# Altium PCB ProtoStack_H750VBT.PcbDoc
Units mil, origin at the board's own origin, x right, y up, seen from the top; angles counter-clockwise.
Board outline 1259.84 x 4809.95 mil, 3 copper layers (Top Layer, Mid-Layer 2, Bottom Layer); 21 components, 96 nets, 324 pads, 70 vias.
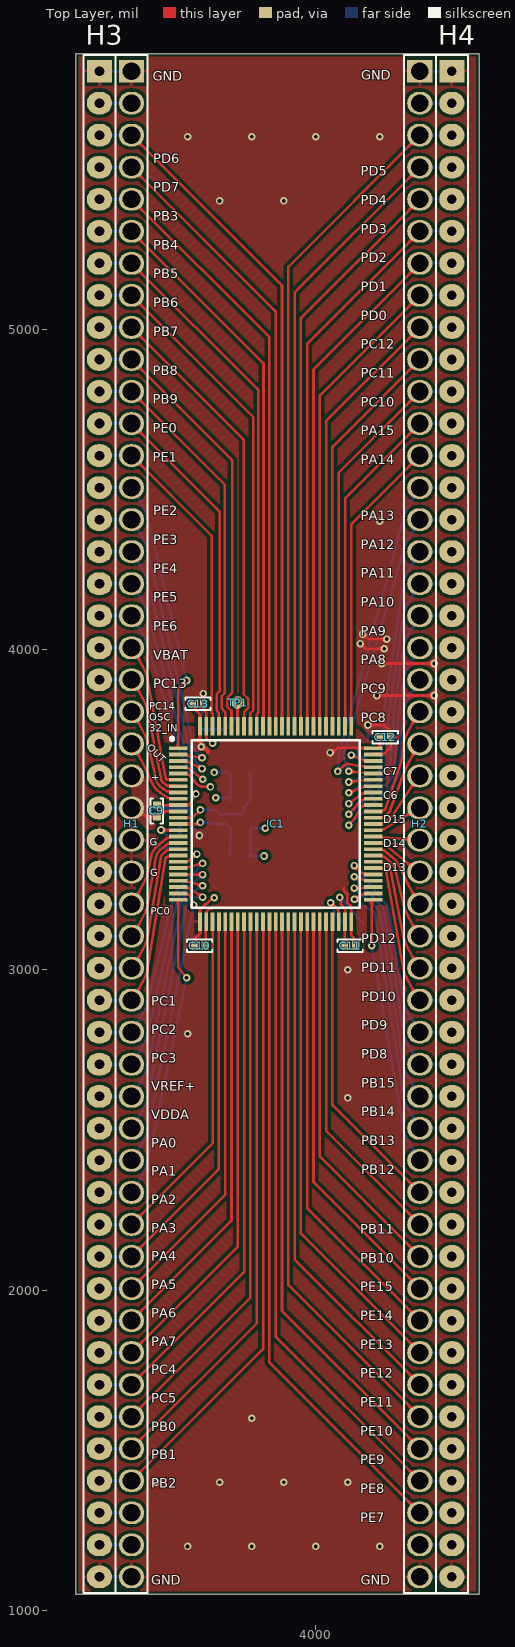
[diagram p0: Top Layer view]
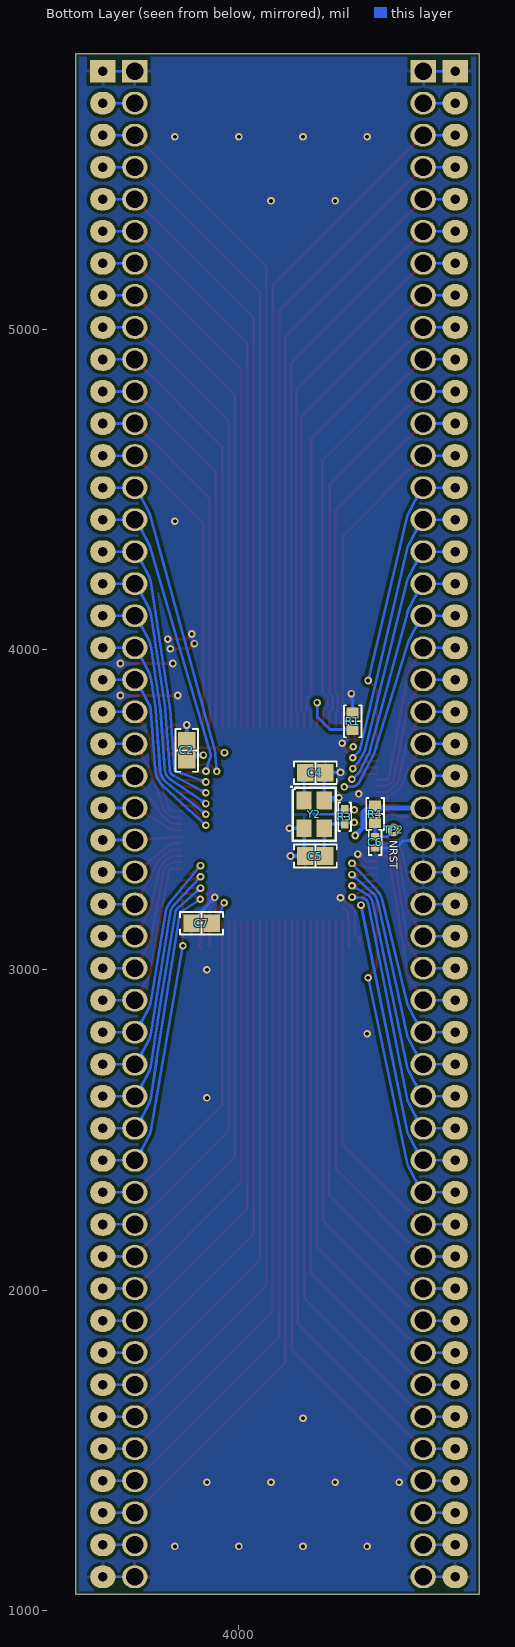
[diagram p1: Bottom Layer view, seen from below]

## Layer stack, top to bottom
Top Solder: solder mask 0.4, Solder Resist, Dk 3.5
Top Layer: signal copper 1.4
Dielectric 1: dielectric 12.6, FR-4, Dk 4.8
Mid-Layer 2: signal copper 1.4
Dielectric2: dielectric 12.6, FR-4, Dk 4.8
Bottom Layer: signal copper 1.4
Bottom Solder: solder mask 0.4, Solder Resist, Dk 3.5

## Board outline
3250.25,1050 3250.25,5859.95 4510.09,5859.95 4510.09,1050

## Design rules (kind name [scope] priority, off if disabled: settings)
BoardOutlineClearance [All] p1: gap=10 ignorepadtopadclearanceinfootprint=FALSE except(0: Arc-SplitContinuation Track-SplitContinuation SMDPad-SplitContinuation THPad-SplitContinuation Via-SplitContinuation Fill-SplitContinuation Poly-SplitContinuation Region-SplitContinuation Text-SplitContinuation)
Clearance [All] p1: gap=10 ignorepadtopadclearanceinfootprint=TRUE except(7: Arc-Arc Arc-Track Arc-SMDPad Arc-THPad Arc-Via Arc-Hole Track-Track Track-SMDPad Track-THPad Track-Via Track-Hole SMDPad-SMDPad SMDPad-THPad SMDPad-Via SMDPad-Hole THPad-Via Fill-Hole Poly-Hole Region-Hole Text-Text Text-Hole)
ComponentClearance [All] p1 off: gap=10 collisioncheckmode=3 verticalgap=10 showdistances=FALSE
PolygonConnect PolygonConnect_1 [All vs InNet('GND')] p1: thpad.connectstyle=Relief thpad.reliefconductorwidth=10 thpad.reliefentries=4 thpad.polygonreliefangle="90 Angle" thpad.airgapwidth=10 smdpad.connectstyle=Relief smdpad.reliefconductorwidth=10 smdpad.reliefentries=4 smdpad.polygonreliefangle="90 Angle" smdpad.airgapwidth=10 via.connectstyle=Direct via.reliefconductorwidth=10 via.reliefentries=4 via.polygonreliefangle="90 Angle" via.airgapwidth=10
PolygonConnect [All vs InNet('+MCU')] p2: thpad.connectstyle=Direct thpad.reliefconductorwidth=10 thpad.reliefentries=4 thpad.polygonreliefangle="90 Angle" thpad.airgapwidth=10 smdpad.connectstyle=Relief smdpad.reliefconductorwidth=10 smdpad.reliefentries=4 smdpad.polygonreliefangle="90 Angle" smdpad.airgapwidth=10 via.connectstyle=Direct via.reliefconductorwidth=10 via.reliefentries=4 via.polygonreliefangle="90 Angle" via.airgapwidth=10
RoutingVias [All] p1: holewidth=11.81 width=23.62 viastyle="Through Hole" minholewidth=11.81 minwidth=23.62 maxholewidth=11.81 maxwidth=23.62
SilkToSilkClearance [All] p1 off: silktosilkclearance=10
SilkToSolderMaskClearance [IsPad] p1 off: minsilkscreentomaskgap=10 clearancetoexposedcopper=TRUE
SolderMaskExpansion [All] p1: expansion=4 istentingtop=FALSE
Width [All] p1: maxlimit=20 minlimit=8 preferedwidth=8
27 further rules are at their usual default settings.

## Components (designator, comment, footprint, x,y, rotation, side; value= is the part's Value field where it differs from the comment)
C2 "2.2µF" "CAP 0805_2012" 4163,3685 r90 bottom
C4 "9pF" "CAP 0805_2012" 3761.5,3615 r0 bottom
C5 "9pF" "CAP 0805_2012" 3761.5,3355 r180 bottom
C6 "0.1µF" "CAP 0402_1005" 3575,3397.68 r90 bottom
C7 "2.2µF" "CAP 0805_2012" 4116.5,3145 r180 bottom
C9 "0.1µF" "CAP 0402_1005" 3504,3495.68 r90 top
C10 "0.1µF" "CAP 0402_1005" 3637.68,3075 r180 top
C11 "0.1µF" "CAP 0402_1005" 4107.32,3075 r180 top
C12 "0.1µF" "CAP 0402_1005" 4217,3726 r0 top
C13 "0.1µF" "CAP 0402_1005" 3632.68,3830 r0 top
H1 "RoundedHeader" HeaderDtack_48 3425,5805 r270 top
H2 "RoundedHeader" HeaderDtack_48 4325,5805 r270 top
H3 "male pin header" Header_48 3325,5805 r270 top
H4 "male pin header" Header_48 4425,5805 r270 top
IC1 "STM32H750VBT6" QFP50P1600X1600X160-100N 3875,3455 r0 top
R1 "10 kOhms" "RES 0603_1608" 3645,3775.59 r90 bottom
R3 "100 Ohms" "RES 0402_1005" 3670,3477.64 r90 bottom
R4 "10 kOhms" "RES 0603_1608" 3575,3485.59 r270 bottom
TP1 "TestPoint" TESTPOINT_VIA 3755.95,3834.06 r90 top
TP2 "NRST" TESTPOINT 3517.17,3436.35 r90 bottom
Y2 "24MHz" "NDK NX3225SA" 3765,3485 r270 bottom

## Footprints (in the part's own frame and the unit in brackets; to place one, negate y for a bottom-side part, rotate by r counter-clockwise, add the part's x,y. Pads: shape width x height; smd on the part's side, far side on the other; paste and mask are expansions set on the pad)
"CAP 0402_1005" [mm] "Chip Capacitor, 2-Leads, Body 1.02x0.51mm, IPC Medium Density"
  rect 0.6x0.64 smd: 1(-0.44,0) 2(0.44,0)
  silkscreen extent -1,-0.5 1,0.5, body extent -0.5,-0.26 0.5,0.26, height 0.52
"CAP 0805_2012" [mm] "Chip Capacitor, 2-Leads, Body 2.00x1.20mm, IPC Medium Density"
  rect 1.3x1.4 smd: 1(-0.8,0) 2(0.8,0)
  silkscreen extent -1.7,-0.9 1.7,0.9, body extent -1,-0.64 1,0.64, height 1.26
Header_48 [mm]
  rect 1.8x2 hole 0.762: 1(0,0)
  oval 1.8x2 hole 0.762: 2(2.54,0) 3(5.08,0) 4(7.62,0) 5(10.16,0) 6(12.7,0) 7(15.24,0) 8(17.78,0) 9(20.32,0) 10(22.86,0) 11(25.4,0) 12(27.94,0) 13(30.48,0) 14(33.02,0) 15(35.56,0) 16(38.1,0) 17(40.64,0) 18(43.18,0) 19(45.72,0) 20(48.26,0) 21(50.8,0) 22(53.34,0) 23(55.88,0) 24(58.42,0) 25(60.96,0) 26(63.5,0) 27(66.04,0) 28(68.58,0) 29(71.12,0) 30(73.66,0) 31(76.2,0) 32(78.74,0) 33(81.28,0) 34(83.82,0) 35(86.36,0) 36(88.9,0) 37(91.44,0) 38(93.98,0) 39(96.52,0) 40(99.06,0) 41(101.6,0) 42(104.14,0) 43(106.68,0) 44(109.22,0) 45(111.76,0) 46(114.3,0) 47(116.84,0) 48(119.38,0)
  silkscreen extent -1.27,-1.27 120.65,1.27
HeaderDtack_48 [mm]
  rect 1.8x2 hole 1.4: 1(0,0)
  oval 1.8x2 hole 1.4: 2(2.54,0) 3(5.08,0) 4(7.62,0) 5(10.16,0) 6(12.7,0) 7(15.24,0) 8(17.78,0) 9(20.32,0) 10(22.86,0) 11(25.4,0) 12(27.94,0) 13(30.48,0) 14(33.02,0) 15(35.56,0) 16(38.1,0) 17(40.64,0) 18(43.18,0) 19(45.72,0) 20(48.26,0) 21(50.8,0) 22(53.34,0) 23(55.88,0) 24(58.42,0) 25(60.96,0) 26(63.5,0) 27(66.04,0) 28(68.58,0) 29(71.12,0) 30(73.66,0) 31(76.2,0) 32(78.74,0) 33(81.28,0) 34(83.82,0) 35(86.36,0) 36(88.9,0) 37(91.44,0) 38(93.98,0) 39(96.52,0) 40(99.06,0) 41(101.6,0) 42(104.14,0) 43(106.68,0) 44(109.22,0) 45(111.76,0) 46(114.3,0) 47(116.84,0) 48(119.38,0)
  silkscreen extent -1.27,-1.27 120.65,1.27
"NDK NX3225SA" [mm] "Crystal, 4-Leads, Body 2.50x3.20mm, Pitch 2.20mm, IPC Medium Density"
  rect 1.4x1.2 smd: 1(-1.1,-0.8) 2(1.1,-0.8) 3(1.1,0.8) 4(-1.1,0.8)
  silkscreen extent -2.25,-1.85 2.1,1.7, body extent -1.61,-1.26 1.61,1.26, height 0.6
QFP50P1600X1600X160-100N [mm]
  rect 1.475x0.3 smd: 1(-7.738,6) 2(-7.738,5.5) 3(-7.738,5) 4(-7.738,4.5) 5(-7.738,4) 6(-7.738,3.5) 7(-7.738,3) 8(-7.738,2.5) 9(-7.738,2) 10(-7.738,1.5) 11(-7.738,1) 12(-7.738,0.5) 13(-7.738,0) 14(-7.738,-0.5) 15(-7.738,-1) 16(-7.738,-1.5) 17(-7.738,-2) 18(-7.738,-2.5) 19(-7.738,-3) 20(-7.738,-3.5) 21(-7.738,-4) 22(-7.738,-4.5) 23(-7.738,-5) 24(-7.738,-5.5) 25(-7.738,-6) 51(7.738,-6) 52(7.738,-5.5) 53(7.738,-5) 54(7.738,-4.5) 55(7.738,-4) 56(7.738,-3.5) 57(7.738,-3) 58(7.738,-2.5) 59(7.738,-2) 60(7.738,-1.5) 61(7.738,-1) 62(7.738,-0.5) 63(7.738,0) 64(7.738,0.5) 65(7.738,1) 66(7.738,1.5) 67(7.738,2) 68(7.738,2.5) 69(7.738,3) 70(7.738,3.5) 71(7.738,4) 72(7.738,4.5) 73(7.738,5) 74(7.738,5.5) 75(7.738,6)
  rect 0.3x1.475 smd: 26(-6,-7.738) 27(-5.5,-7.738) 28(-5,-7.738) 29(-4.5,-7.738) 30(-4,-7.738) 31(-3.5,-7.738) 32(-3,-7.738) 33(-2.5,-7.738) 34(-2,-7.738) 35(-1.5,-7.738) 36(-1,-7.738) 37(-0.5,-7.738) 38(0,-7.738) 39(0.5,-7.738) 40(1,-7.738) 41(1.5,-7.738) 42(2,-7.738) 43(2.5,-7.738) 44(3,-7.738) 45(3.5,-7.738) 46(4,-7.738) 47(4.5,-7.738) 48(5,-7.738) 49(5.5,-7.738) 50(6,-7.738) 76(6,7.738) 77(5.5,7.738) 78(5,7.738) 79(4.5,7.738) 80(4,7.738) 81(3.5,7.738) 82(3,7.738) 83(2.5,7.738) 84(2,7.738) 85(1.5,7.738) 86(1,7.738) 87(0.5,7.738) 88(0,7.738) 89(-0.5,7.738) 90(-1,7.738) 91(-1.5,7.738) 92(-2,7.738) 93(-2.5,7.738) 94(-3,7.738) 95(-3.5,7.738) 96(-4,7.738) 97(-4.5,7.738) 98(-5,7.738) 99(-5.5,7.738) 100(-6,7.738)
  silkscreen extent -8.35,-6.65 6.65,6.87, body extent -8,-8 8,8, height 1.6
"RES 0402_1005" [mm] "Chip Resistor, 2-Leads, Body 1.0x0.5mm, IPC Medium Density"
  rect 0.75x0.6 smd: 1(-0.575,0) 2(0.575,0)
  silkscreen extent -1.14,-0.51 1.14,0.51, body extent -0.5,-0.25 0.5,0.25, height 0.35
"RES 0603_1608" [mm] "Chip Resistor, 2-Leads, Body 1.60x0.80mm, IPC Medium Density"
  rect 0.85x0.95 smd: 1(-0.65,0) 2(0.65,0)
  silkscreen extent -1.27,-0.7 1.27,0.7, body extent -0.8,-0.4 0.8,0.4, height 0.45
TESTPOINT [mil]
  round 39.37 / inner round 0 / far side round 0 all layers, no hole mask+1.98: 1(0,0)
TESTPOINT_VIA [mm]
  round 1 / inner round 0 / far side round 0 all layers, no hole mask+0.102: 1(0,0)

## Part data
C2 C7: library part C0805C225K8RACTU, "CAP CER 2.2UF 10V X7R 0805", Device Package="0805 (2012 Metric)", Manufacturer=KEMET, Operating Temperature="-55°C ~ 125°C", Supplier Part Number 1=399-3522-1-ND, Temperature Coefficient=X7R, Tolerance=±10%, Voltage - Rated=10V, Applications="Bypass, Decoupling", Capacitance=2.2µF, ComponentLink1Description=Datasheet, ComponentLink1URL=https://api.kemet.com/component-edge/download/datasheet/C0805C225K8RACTU.pdf, ComponentLink2Description="DigiKey Link", ComponentLink2URL=http://digikey.com/product-detail/en/kemet/C0805C225K8RACTU/399-3522-1-ND/789662, LastUpdated="9/2/2020 1:04:33 AM", Lifecycle Status=Active, Minimum Order=1, Mounting Type="Surface Mount, MLCC", Package / Case="0805 (2012 Metric)", Packaging=TapeAndReel, Part Number=C0805C225K8RACTU, Part Status=Active, PartId=7297, Price=0.04, Series="SMD Comm X7R", Size / Dimension="0.079\" L x 0.049\" W (2.00mm x 1.25mm)", Supplier 1=DigiKey, Thickness (Max)="0.055\" (1.40mm)"
C4 C5: library part CBR08C909CAGAC, "CAP CER 9PF 250V C0G/NP0 0805", Device Package="0805 (2012 Metric)", Manufacturer=KEMET, Operating Temperature="-55°C ~ 125°C", Supplier Part Number 1=399-8711-1-ND, Temperature Coefficient="C0G, NP0", Tolerance=±0.25pF, Voltage - Rated=250V, Applications="RF, Microwave, High Frequency", Capacitance=9pF, ComponentLink1Description=Datasheet, ComponentLink1URL=https://api.kemet.com/component-edge/download/datasheet/CBR08C909CAGAC.pdf, ComponentLink2Description="DigiKey Link", ComponentLink2URL=http://digikey.com/product-detail/en/kemet/CBR08C909CAGAC/399-8711-1-ND/3480335, Features="High Q, Low Loss, Ultra Low ESR", LastUpdated="9/2/2020 1:04:31 AM", Lifecycle Status=Active, Minimum Order=1, Mounting Type="Surface Mount, MLCC", Package / Case="0805 (2012 Metric)", Packaging=TapeAndReel, Part Number=CBR08C909CAGAC, Part Status=Active, PartId=8592, Price=0.28, Series="CBR-SMD RF C0G", Size / Dimension="0.079\" L x 0.049\" W (2.00mm x 1.25mm)", Supplier 1=DigiKey, Thickness (Max)="0.035\" (0.88mm)"
C6 C9 C10 C11 C12 C13: library part C0402C104K4RACAUTO, "CAP CER 0.1UF 16V X7R 0402", Device Package="0402 (1005 Metric)", Manufacturer=KEMET, Operating Temperature="-55°C ~ 125°C", Ratings=AEC-Q200, Supplier Part Number 1=399-6828-1-ND, Temperature Coefficient=X7R, Tolerance=±10%, Voltage - Rated=16V, Applications="Automotive, Bypass, Decoupling", Capacitance=0.1µF, ComponentLink1Description=Datasheet, ComponentLink1URL=https://api.kemet.com/component-edge/download/specsheet/C0402C104K4RACAUTO.pdf, ComponentLink2Description="DigiKey Link", ComponentLink2URL=http://digikey.com/product-detail/en/kemet/C0402C104K4RACAUTO/399-6828-1-ND/3314343, LastUpdated="9/2/2020 1:02:21 AM", Lifecycle Status=Active, Minimum Order=1, Mounting Type="Surface Mount, MLCC", Package / Case="0402 (1005 Metric)", Packaging=TapeAndReel, Part Number=C0402C104K4RACAUTO, Part Status=Active, PartId=3024, Price=0.01, Series="SMD Auto X7R", Size / Dimension="0.039\" L x 0.020\" W (1.00mm x 0.50mm)", Supplier 1=DigiKey, Thickness (Max)="0.022\" (0.55mm)"
H1: library part HeaderStack_48_H7VB50_L
H2: library part HeaderStack_48_H7VB50_R
H3 H4: library part Header_48
IC1: "Integrated Circuit", Manufacturer_Name=STMicroelectronics, Mouser Part Number=511-STM32H750VBT6, Arrow Part Number=STM32H750VBT6, Arrow Price/Stock=https://www.arrow.com/en/products/stm32h750vbt6/stmicroelectronics?region=nac, Datasheet Link=https://www.st.com/resource/en/datasheet/stm32h750vb.pdf, Height=1.6mm, Manufacturer_Part_Number=STM32H750VBT6, Mouser Price/Stock=https://www.mouser.co.uk/ProductDetail/STMicroelectronics/STM32H750VBT6?qs=%252BEew9%252B0nqrBAeuu%2FsQQSzQ%3D%3D
R1 R4: library part RT0603FRE0710KL, "RES SMD 10K OHM 1% 1/10W 0603", Device Package="0603 (1608 Metric)", Manufacturer=Yageo, Operating Temperature="-55°C ~ 155°C", Power (Watts)="0.1W, 1/10W", Supplier Device Package=0603, Supplier Part Number 1=YAG2321CT-ND, Temperature Coefficient=±50ppm/°C, Tolerance=±1%, ComponentLink1Description=Datasheet, ComponentLink1URL=https://www.yageo.com/upload/media/product/productsearch/datasheet/rchip/PYu-RT_1-to-0.01_RoHS_L_11.pdf, ComponentLink2Description="DigiKey Link", ComponentLink2URL=http://digikey.com/product-detail/en/yageo/RT0603FRE0710KL/YAG2321CT-ND/5252435, Composition="Thin Film", Height - Seated (Max)="0.022\" (0.55mm)", LastUpdated="9/2/2020 1:10:23 AM", Lifecycle Status=Active, Minimum Order=1, Number of Terminations=2, Package / Case="0603 (1608 Metric)", Packaging=TapeAndReel, Part Number=RT0603FRE0710KL, Part Status=Active, PartId=5671, Price=0.01, Resistance="10 kOhms", Series=RT, Size / Dimension="0.063\" L x 0.031\" W (1.60mm x 0.80mm)", Supplier 1=DigiKey
R3: library part RT0402FRE07100RL, "RES SMD 100 OHM 1% 1/16W 0402", Device Package="0402 (1005 Metric)", Manufacturer=Yageo, Operating Temperature="-55°C ~ 155°C", Power (Watts)="0.063W, 1/16W", Supplier Device Package=0402, Supplier Part Number 1=YAG3342CT-ND, Temperature Coefficient=±50ppm/°C, Tolerance=±1%, ComponentLink1Description=Datasheet, ComponentLink1URL=https://www.yageo.com/upload/media/product/productsearch/datasheet/rchip/PYu-RT_1-to-0.01_RoHS_L_11.pdf, ComponentLink2Description="DigiKey Link", ComponentLink2URL=http://digikey.com/product-detail/en/yageo/RT0402FRE07100RL/YAG3342CT-ND/5418047, Composition="Thin Film", Height - Seated (Max)="0.014\" (0.35mm)", LastUpdated="9/2/2020 1:08:09 AM", Lifecycle Status=Active, Minimum Order=1, Not Fit=NF, Number of Terminations=2, Package / Case="0402 (1005 Metric)", Packaging=TapeAndReel, Part Number=RT0402FRE07100RL, Part Status=Active, PartId=3193, Price=0.01, Resistance="100 Ohms", Series=RT, Size / Dimension="0.039\" L x 0.020\" W (1.00mm x 0.50mm)", Supplier 1=DigiKey
TP2: library part TestPoint
Y2: library part NX3225SA-24MHZ-EXS00A-CS07532, "CRYSTAL 24MHZ 9PF SMD", ESR (Equivalent Series Resistance)="100 Ohms", Load Capacitance=9pF, Manufacturer="NDK America, Inc.", Operating Mode=Fundamental, Operating Temperature="-40°C ~ 150°C", Package / Case="4-SMD, No Lead", Ratings=AEC-Q200, Supplier Part Number 1=644-1393-1-ND, ComponentLink2Description="DigiKey Link", ComponentLink2URL=http://digikey.com/product-detail/en/ndk-america-inc/NX3225SA-24MHZ-EXS00A-CS07532/644-1393-1-ND/9172121, Frequency=24MHz, Height - Seated (Max)="0.024\" (0.60mm)", LastUpdated="9/2/2020 1:21:59 AM", Lifecycle Status=Active, Minimum Order=1, Mounting Type="Surface Mount", Packaging=TapeAndReel, Part Number=NX3225SA-24MHZ-EXS00A-CS07532, Part Status=Active, PartId=571, Price=0.38, Series=NX3225SA, Size / Dimension="0.126\" L x 0.098\" W (3.20mm x 2.50mm)", Supplier 1=DigiKey, Type="MHz Crystal"

## Via types
v1: diameter 23.62, hole 11.81, Top Layer to Bottom Layer, tented both sides, 69 vias
v2: diameter 23.62/23.62/23.62 (per signal layer), hole 12, Top Layer to Bottom Layer, tented both sides, 1 vias

## Nets (pads, with @x,y where several pads share a name; then routed paths per layer and width w, separated by ;. In a path a pad name is that pad's centre, name@x,y a point inside that pad or via, vN(x,y) a via of type N, cw(c..) or ccw(c..) an arc to the next point about the centre after c; other vN are vias at no path point)
+MCU: C9.1 C10.1 C11.1 C12.1 C13.1 H1.23 H1.24 H3.23 H3.24 IC1.11 IC1.27 IC1.50 IC1.75 IC1.100 R4.1 | length 1432.8
  Top Layer w8: H1.24 3442.73,3505 3469.37,3478.35 C9.1 3511.81,3486.16 3523.16,3486.16 3531.37,3494.37 IC1.11 ; C13.1 3623.16,3822.19 3623.16,3811.84 3638.78,3796.22 IC1.100 3638.78,3710.22 ; 3627.76,3718 3631,3718 3638.78,3710.22 ; v1@3642.36,3706.64 3638.78,3710.22 ; v1@3642.38,3706.62 cw(c3636.71,3700.98) 3643.36,3696.54 v1(3643,3696) ; C10.1@3653.5,3073.5 C10.1 3656.73,3076.73 3656.73,3148.62 IC1.27 3660.37,3152.26 3660.37,3183.07 3667.69,3190.39 3674.37,3190.39 ; 3663.78,3675.48 3661.49,3677.77 3661.49,3679.18 v1@3647.66,3693.01 ; 3665.85,3686.89 3659.73,3693.01 v1@3650.22,3693.01 ; 3666.9,3682.68 3660.55,3682.68 v1@3650.22,3693.01 ; v1(4045,3678) 4046.19,3676.81 4052.81,3676.81 4068.81,3692.81 4178.06,3692.81 IC1.75 IC1.75@4192.16,3692.17 ; 4087,3254 4087,3246.55 4098.16,3235.4 4098.16,3210.55 4111.22,3197.49 IC1.50 4111.22,3107.27 4118.89,3099.6 4118.89,3080.76 C11.1 C11.1@4116.84,3066.4 ; C12.1 4199.68,3693.13 IC1.75@4199.26,3692.71 ; IC1.75@4204.68,3693.13 IC1.75@4199.26,3692.71 ; v1(3643,3696) 3645.99,3693.01 v1@3647.66,3693.01 ; v1(3643,3696) v1@3644.67,3696 ; v1@3644.67,3696 3647.23,3696 v1@3650.22,3693.01 ; v1@3644.67,3696 v1@3647.66,3693.01 ; v1@3647.66,3693.01 v1@3650.22,3693.01 ; IC1.75@4192.16,3692.17 4198.72,3692.17 IC1.75@4199.26,3692.71 ; IC1.75@4192.16,3692.17 IC1.75@4199.26,3692.71
  Bottom Layer w8: H3.24 H1.24 ; H3.23 H1.23
  Bottom Layer w15: H1.24 3568.82,3505 R4.1 3585.73,3500.45 3603.55,3500.45 3613,3491 3613,3443 v1(3637,3419)
GND: C2.2 C4.1 C5.1 C6.1 C7.1 C9.2 C10.2 C11.2 C12.2 C13.2 H1.1 H1.25 H1.26 H1.48 H2.1 H2.48 H3.1 H3.25 H3.26 H3.48 H4.1 H4.48 IC1.10 IC1.19 IC1.26 IC1.49 IC1.74 IC1.99 R1.2 Y2.2 Y2.4 | length 2760.8
  Top Layer w8: C9.2 3504.53,3513.53 3569.83,3513.53 IC1.10 3601.76,3514.06 ccw(c3601.76,3522.06) 3608.75,3518.15 v1(3626,3549) ; IC1.19 3572.26,3338.8 3603.36,3338.8 3625.56,3361 v1(3629,3361) ; C10.2 3622,3076.65 3622,3096 3638.78,3112.78 IC1.26 3638.78,3188.78 3654.19,3204.19 3658.19,3204.19 3679,3225 v1(3683,3225) ; v1(3649,3862) 3649.5,3861.5 3649.5,3830.5 C13.2 3650,3810 3658.46,3801.54 IC1.99 3658.46,3722.54 3674,3707 v1(3678,3707) ; v1(4075.34,3225.95) 4078.33,3222.96 4078.33,3204.59 4091.53,3191.39 IC1.49 4090.77,3149.59 4090.77,3075.77 C11.2 ; v1(4139,4018) 4155,4002 v1(4214,4002) ; v1(4147,4048) 4149,4048 4165,4032 v1(4222,4032) ; v1(4163,3764) 4212,3764 4226.51,3749.49 4226.51,3733.81 C12.2 4234.32,3695.4 4212.36,3673.44 4181.55,3673.44 IC1.74 ; v1(4191,3856) v1(4370,3856) ; v1(4206,3956) v1(4370,3956)
  Bottom Layer w8: H3.48 H1.48 ; H3.26 H1.26 ; H3.25 H1.25 3427,3403 3486,3403 3508.65,3380.35 C6.1 ; H3.1 H1.1 ; R1.2 3645,3858 v1(3649,3862) ; v1(3683,3616) 3729,3616 C4.1 3733.5,3611.5 Y2.4 ; v1(3688,3537) Y2.4@3734,3537 ; v1(3838.99,3355) C5.1 3796.5,3358.5 Y2.2 v1(3842.5,3441.69) ; v1(4075.34,3225.95) 4117.84,3180.86 ccw(c4123.67,3186.34) 4118.13,3180.57 cw(c4110.59,3172.56) 4119.78,3178.61 4126.4,3168.56 C7.1 ; C2.2 4163,3738.09 v1(4163,3764) ; v1@4221,4034 4221,4033 v1(4222,4032) ; H2.48 H4.48 ; H2.1 H4.1 ; v1(4370,3856) v1@4371,3856
  other v1: 3600,1200 3800,1200 4000,1200 4200,1200 3500,1400 3700,1400 3900,1400 4100,1400 3800,1600 4100,2600 3600,2800 4100,3000 4200,4400 3700,5400 3900,5400 3600,5600 3800,5600 4000,5600 4200,5600
NetC2_1: C2.1 IC1.73 | length 129
  Top Layer w8: v1(4111,3670) 4146.46,3655.44 ccw(c4150.61,3665.63) 4148.68,3654.8 4154.61,3653.76 IC1.73
  Bottom Layer w8: v1(4111,3670) 4139.44,3670 C2.1
NetC4_2: C4.2 IC1.12 R3.2 Y2.1 | length 356.7
  Top Layer w8: IC1.12 3615.69,3474.69 v1(3640,3499)
  Bottom Layer w8: v1(3640,3499) 3668.72,3499 R3.2 3671.28,3499 3689,3499 3703,3485 3766,3485 3776.87,3495.87 3776.87,3508.69 Y2.1 3796.5,3611.5 C4.2
NetC5_2: C5.2 IC1.13 R3.1 Y2.3 | length 260.9
  Top Layer w8: IC1.13 3630.77,3455 3635.77,3460 v1(3640,3460)
  Bottom Layer w8: v1(3640,3460) 3665,3460 R3.1 3720.2,3455 Y2.3 3733.5,3358.5 C5.2
NetC6_2: C6.2 IC1.14 R4.2 TP2.1 | length 165.3
  Top Layer w8: v1(3517.17,3436.35) 3517.68,3435.83 3569.84,3435.83 IC1.14
  Bottom Layer w8: v1(3517.17,3436.35) 3538.51,3415 C6.2 R4.2
NetC7_2: C7.2 IC1.48 | length 145.6
  Top Layer w8: v1(4046.38,3208.87) 4067.01,3190.96 cw(c4061.77,3184.92) 4067.39,3190.61 4069.94,3188.06 4069.94,3152.26 IC1.48
  Bottom Layer w8: v1(4046.38,3208.87) 4063.17,3169.49 ccw(c4070.53,3172.63) 4064.61,3167.25 C7.2
NetH1_2: H1.2 H3.2 | length 100
  Bottom Layer w8: H3.2 H1.2
NetH1_46: H1.46 H3.46 | length 100
  Bottom Layer w8: H3.46 H1.46
NetH1_47: H1.47 H3.47 | length 100
  Bottom Layer w8: H3.47 H1.47
NetH2_2: H2.2 H4.2 | length 100
  Bottom Layer w8: H2.2 H4.2
NetH2_47: H2.47 H4.47 | length 100
  Bottom Layer w8: H2.47 H4.47
NetIC1_94: IC1.94 R1.1 TP1.1 | length 247
  Top Layer w8: v2(3755.95,3834.06) 3755.95,3760.59 IC1.94
  Bottom Layer w8: R1.1 3716,3750 3755,3789 v2@3755,3835
PA0: H1.33 H3.33 IC1.22 | length 895.4
  Top Layer w8: IC1.22 3595.39,3275.93 3601.3,3274.89 cw(c3599.39,3264.06) 3602.39,3274.64 v1(3647,3262)
  Bottom Layer w8: H3.33 H1.33 3428.94,2605 3470.06,2683.44 ccw(c3428.94,2705) 3474.39,2695.49 3581.99,3209.75 cw(c3619,3202) 3600,3234.69 v1(3647,3262)
PA1: H1.34 H3.34 IC1.23 | length 972.8
  Top Layer w8: IC1.23 3595.39,3256.24 3601.3,3255.2 cw(c3599.39,3244.37) 3605.31,3253.64 v1(3647,3227)
  Bottom Layer w8: H3.34 H1.34 3428.94,2505 3470.06,2583.44 ccw(c3428.94,2605) 3474.47,2595.89 3596.63,3206.48 cw(c3619,3202) 3617.27,3224.75 v1(3647,3227)
PA2: H1.35 H3.35 IC1.24 | length 997.2
  Top Layer w8: IC1.24 3595.39,3236.56 3601.3,3235.52 cw(c3599.39,3224.69) 3609.77,3228.33 ; 3609.77,3228.32 v1(3619,3202)
  Bottom Layer w8: H3.35 H1.35 3428.94,2405 3470.06,2483.44 ccw(c3428.94,2505) 3474.43,2495.69 v1(3619,3202)
PA3: H1.36 H3.36 IC1.25 | length 1050.5
  Top Layer w8: IC1.25 3570.35,3011.43 ccw(c3578.35,3011.43) 3572.07,3006.48 v1(3597,2975)
  Bottom Layer w8: H3.36 H1.36 3428.94,2305 3470.06,2383.44 ccw(c3428.94,2405) 3474.35,2395.32 ; 3474.36,2395.35 v1(3597,2975)
PA4: H1.37 H3.37 IC1.28 | length 1150.2
  Top Layer w8: H1.37 3678.15,2458.15 IC1.28
  Bottom Layer w8: H3.37 H1.37
PA5: H1.38 H3.38 IC1.29 | length 1258.4
  Top Layer w8: H1.38 3697.84,2377.84 IC1.29
  Bottom Layer w8: H3.38 H1.38
PA6: H1.39 H3.39 IC1.30 | length 1366.5
  Top Layer w8: H1.39 3717.52,2297.52 IC1.30
  Bottom Layer w8: H3.39 H1.39
PA7: H1.40 H3.40 IC1.31 | length 1474.7
  Top Layer w8: H1.40 3737.21,2217.21 IC1.31
  Bottom Layer w8: H3.40 H1.40
PA8: H2.19 H4.19 IC1.67 | length 797.7
  Top Layer w8: v1(4103,3485.13) 4119.78,3503.31 ccw(c4103,3518.76) 4120.9,3504.61 4130.21,3516.4 cw(c4150.61,3500.28) 4133.75,3520.07 4143.47,3528.33 cw(c4150.61,3519.96) 4148.7,3530.8 4154.61,3531.83 IC1.67
  Bottom Layer w8: v1(4103,3485.13) 4225.76,3584.36 ccw(c4190.56,3627.91) 4246.41,3623.89 4259.79,3809.37 cw(c4321.06,3805) 4260.31,3814.14 4275.16,3912.02 cw(c4321.06,3905) 4279.94,3926.56 4321.06,4005 H2.19 ; H2.19@4323.03,4005 H4.19@4423.03,4005
PA9: H2.18 H4.18 IC1.68 | length 855.3
  Top Layer w8: v1(4103,3518.76) 4144.16,3548.56 cw(c4150.61,3539.65) 4148.7,3550.48 4154.61,3551.52 IC1.68
  Bottom Layer w8: v1(4103,3518.76) 4213.62,3594.01 ccw(c4190.56,3627.91) 4231.46,3625.04 4244.83,3810.48 cw(c4321.06,3805) 4245.49,3816.42 4275.16,4012.02 cw(c4321.06,4005) 4279.94,4026.56 4321.06,4105 H2.18 H4.18
PA10: H2.17 H4.17 IC1.69 | length 916.9
  Top Layer w8: v1(4103,3552.38) 4146.57,3569.56 cw(c4150.61,3559.33) 4148.7,3570.17 4154.61,3571.2 IC1.69
  Bottom Layer w8: v1(4103,3552.38) 4202.68,3604.91 ccw(c4190.56,3627.91) 4216.49,3626.04 4229.87,3811.57 cw(c4321.06,3805) 4230.66,3818.72 4275.16,4112.02 cw(c4321.06,4105) 4279.94,4126.56 4321.06,4205 H2.17 H4.17
PA11: H2.16 H4.16 IC1.70 | length 984
  Top Layer w8: v1(4103,3586) 4154.61,3590.89 IC1.70
  Bottom Layer w8: v1(4103,3586) 4194.15,3617.52 ccw(c4190.56,3627.91) 4201.53,3627.12 4214.91,3812.72 cw(c4321.06,3805) 4215.83,3820.91 4275.16,4212.02 cw(c4321.06,4205) 4279.94,4226.56 4321.06,4305 H2.16 H4.16
PA12: H2.15 H4.15 IC1.71 | length 1006.3
  Top Layer w8: v1(4102.89,3619.62) 4154.61,3614.39 IC1.71
  Bottom Layer w8: v1(4102.89,3619.62) 4089.22,3663.21 cw(c4111,3670) 4089.11,3676.41 4276.51,4318.08 cw(c4321.06,4305) 4279.94,4326.56 H2.15@4321.06,4405 ; H2.15 H2.15@4321.06,4405 ; H4.15@4421.06,4405 H2.15@4321.06,4405
PA13: H2.14 H4.14 IC1.72 | length 1148
  Top Layer w8: v1(4069,3619) 4087.23,3636.21 cw(c4102.89,3619.62) 4106.67,3642.12 4154.61,3634.07 IC1.72
  Bottom Layer w8: v1(4069,3619) 4073.31,3673.01 cw(c4111,3670) 4074.53,3679.98 4276.28,4417.26 cw(c4321.06,4405) 4279.94,4426.56 4321.06,4505 H2.14 H4.14
PA14: H2.13 H4.13 IC1.76 | length 1033.9
  Top Layer w8: IC1.76 4111.22,4391.22 H2.13
  Bottom Layer w8: H2.13 H4.13
PA15: H2.12 H4.12 IC1.77 | length 1142.1
  Top Layer w8: IC1.77 4091.53,4471.53 H2.12
  Bottom Layer w8: H2.12 H4.12
PB0: H1.43 H3.43 IC1.34 | length 1799.1
  Top Layer w8: H1.43 3796.26,1976.26 IC1.34
  Bottom Layer w8: H3.43 H1.43
PB1: H1.44 H3.44 IC1.35 | length 1907.3
  Top Layer w8: H1.44 3815.95,1895.95 IC1.35
  Bottom Layer w8: H3.44 H1.44
PB2: H1.45 H3.45 IC1.36 | length 2015.4
  Top Layer w8: H1.45 3835.63,1815.63 IC1.36
  Bottom Layer w8: H3.45 H1.45
PB3: H1.5 H3.5 IC1.89 | length 1923.6
  Top Layer w8: H1.5 3855.31,4974.69 IC1.89
  Bottom Layer w8: H3.5 H1.5
PB4: H1.6 H3.6 IC1.90 | length 1816.6
  Top Layer w8: H1.6 3837,4893 3837,3761.02 IC1.90
  Bottom Layer w8: H3.6 H1.6
PB5: H1.7 H3.7 IC1.91 | length 1711.5
  Top Layer w8: H1.7 3821,4809 3821,3803.17 3815.94,3798.11 IC1.91
  Bottom Layer w8: H3.7 H1.7
PB6: H1.8 H3.8 IC1.92 | length 1606.4
  Top Layer w8: H1.8 3805,4725 3805,3809.79 3796.26,3801.05 IC1.92
  Bottom Layer w8: H3.8 H1.8
PB7: H1.9 H3.9 IC1.93 | length 1501.3
  Top Layer w8: H1.9 3775,4655 3775,3860 3789,3846 3789,3816.42 3776.57,3804 IC1.93
  Bottom Layer w8: H3.9 H1.9
PB8: H1.10 H3.10 IC1.95 | length 1388.5
  Top Layer w8: H1.10 3740,4590 3740,3864.81 3723.31,3848.12 3723.31,3821.88 3737.2,3807.99 IC1.95
  Bottom Layer w8: H3.10 H1.10
PB9: H1.11 H3.11 IC1.96 | length 1273.7
  Top Layer w8: H1.11 3716,4514 3716,3863.44 3707.31,3854.75 3707.31,3815.25 3717.52,3805.04 IC1.96
  Bottom Layer w8: H3.11 H1.11
PB10: H2.37 H4.37 IC1.46 | length 1166.5
  Top Layer w8: IC1.46 4032.48,2497.52 H2.37
  Bottom Layer w8: H2.37 H4.37
PB11: H2.36 H4.36 IC1.47 | length 1058.4
  Top Layer w8: IC1.47 4052.17,2577.83 H2.36
  Bottom Layer w8: H2.36@4323.03,2305 H4.36@4423.03,2305
PB12: H2.35 H4.35 IC1.51 | length 940.4
  Top Layer w8: v1(4175,3075) 4175,3216.87 IC1.51
  Bottom Layer w8: v1(4175,3075) 4275.31,2497.06 ccw(c4321.06,2505) 4279.94,2483.44 4321.06,2405 H2.35 ; H2.35@4323.03,2405 H4.35@4423.03,2405
PB13: H2.34 H4.34 IC1.52 | length 934.5
  Top Layer w8: v1(4120.97,3220) 4120.97,3220.18 4120.73,3220.41 4145.19,3234.26 cw(c4150.61,3224.69) 4148.7,3235.52 4154.61,3236.56 IC1.52
  Bottom Layer w8: v1(4120.97,3220) 4120.68,3219.72 4120.68,3219.56 4179.52,3181.82 cw(c4173.58,3172.56) 4184.45,3174.28 4257.39,2715.15 4275.17,2597.97 ccw(c4321.06,2605) 4279.89,2583.53 4321.06,2505 H2.34 ; H2.34@4323.03,2505 H4.34@4423.03,2505
PB14: H2.33 H4.33 IC1.53 | length 864.9
  Top Layer w8: v1(4120,3255) 4154.61,3256.24 IC1.53
  Bottom Layer w8: v1(4120,3255) 4190.86,3191.99 cw(c4173.58,3172.56) 4199.24,3176.75 4245.49,2893.55 4275.17,2697.97 ccw(c4321.06,2705) 4279.89,2683.53 4321.06,2605 H2.33 ; H2.33@4323.03,2605 H4.33@4423.03,2605
PB15: H2.32 H4.32 IC1.54 | length 801.8
  Top Layer w8: v1(4120,3290) 4147.23,3281.15 ccw(c4150.61,3291.61) 4148.7,3280.78 4154.61,3279.74 IC1.54
  Bottom Layer w8: v1(4120,3290) 4203.55,3200.54 cw(c4173.58,3172.56) 4214.05,3179.17 4260.3,2895.96 cw(c4245.49,2893.55) 4260.32,2895.8 4275.17,2797.97 ccw(c4321.06,2805) 4279.89,2783.53 4321.06,2705 H2.32 ; H2.32@4323.03,2705 H4.32@4423.03,2705
PC0: H1.27 H3.27 IC1.15 | length 377.5
  Top Layer w8: H1.27 3428.94,3205 3470.06,3283.44 ccw(c3428.94,3305) 3474.41,3295.62 3486.47,3354.1 cw(c3541.32,3342.8) 3505.05,3385.47 3534.2,3410.23 cw(c3541.32,3401.85) 3539.41,3412.69 3545.32,3413.72 IC1.15
  Bottom Layer w8: H3.27 H1.27
PC1: H1.28 H3.28 IC1.16 | length 452.8
  Top Layer w8: H1.28 3428.94,3105 3470.06,3183.44 ccw(c3428.94,3205) 3474.7,3197.14 3500.91,3349.74 cw(c3541.32,3342.8) 3514.77,3374.04 3524.46,3382.27 3534.2,3390.55 cw(c3541.32,3382.17) 3539.41,3393 3545.32,3394.04 IC1.16
  Bottom Layer w8: H3.28 H1.28
PC2: H1.29 H3.29 IC1.17 | length 528.2
  Top Layer w8: H1.29 3428.94,3005 3470.06,3083.44 ccw(c3428.94,3105) 3474.84,3098.03 3515.66,3346.97 cw(c3541.32,3342.8) 3524.48,3362.61 3534.19,3370.86 cw(c3541.32,3362.48) 3539.41,3373.32 3545.32,3374.35 IC1.17
  Bottom Layer w8: H3.29 H1.29
PC3: H1.30 H3.30 IC1.18 | length 603.6
  Top Layer w8: H1.30 3428.94,2905 3470.06,2983.44 ccw(c3428.94,3005) 3474.84,2998.03 3530.46,3344.54 cw(c3541.32,3342.8) 3539.41,3353.63 3545.32,3354.67 IC1.18
  Bottom Layer w8: H3.30 H1.30
PC4: H1.41 H3.41 IC1.32 | length 1582.8
  Top Layer w8: H1.41 3756.89,2136.89 IC1.32
  Bottom Layer w8: H3.41 H1.41
PC5: H1.42 H3.42 IC1.33 | length 1691
  Top Layer w8: H1.42 3776.58,2056.58 IC1.33
  Bottom Layer w8: H3.42 H1.42
PC6: H2.23 H4.23 IC1.63 | length 320.7
  Top Layer w8: IC1.63 4204.68,3456.91 4210.59,3457.95 ccw(c4208.68,3468.78) 4215.8,3460.4 4225.52,3468.65 4235.23,3476.91 ccw(c4208.68,3508.15) 4242.99,3485.7 4321.06,3605 H2.23
  Bottom Layer w8: H2.23 H4.23
PC7: H2.22 H4.22 IC1.64 | length 391.3
  Top Layer w8: IC1.64 4204.68,3476.59 4210.59,3477.63 ccw(c4208.68,3488.46) 4215.81,3480.08 4225.52,3488.34 ccw(c4208.68,3508.15) 4233.11,3499.25 4277.44,3620.9 cw(c4321.06,3605) 4279.92,3626.52 4321.06,3705 H2.22
  Bottom Layer w8: H2.22 H4.22
PC8: H2.21 H4.21 IC1.65 | length 466.4
  Top Layer w8: IC1.65 4204.68,3496.28 4210.59,3497.32 ccw(c4208.68,3508.15) 4219.14,3504.74 4268.06,3654.78 ccw(c4257.6,3658.19) 4268.52,3656.88 4274.96,3710.53 cw(c4321.06,3705) 4279.94,3726.56 4321.06,3805 H2.21
  Bottom Layer w8: H2.21 H4.21
PC9: H2.20 H4.20 IC1.66 | length 743.2
  Top Layer w8: v1(4103,3451) 4119.97,3469.89 ccw(c4103,3485.13) 4122.8,3473.81 4141.06,3505.74 cw(c4150.61,3500.28) 4148.7,3511.11 4154.61,3512.15 IC1.66
  Bottom Layer w8: v1(4103,3451) 4238.6,3575.64 ccw(c4190.56,3627.91) 4261.38,3622.86 4274.75,3808.27 cw(c4321.06,3805) 4279.94,3826.56 4321.06,3905 H2.20 H4.20
PC10: H2.11 H4.11 IC1.78 | length 1250.2
  Top Layer w8: IC1.78 4071.85,4551.85 H2.11
  Bottom Layer w8: H2.11 H4.11
PC11: H2.10 H4.10 IC1.79 | length 1358.4
  Top Layer w8: IC1.79 4052.16,4632.16 H2.10
  Bottom Layer w8: H2.10 H4.10
PC12: H2.9 H4.9 IC1.80 | length 1466.5
  Top Layer w8: IC1.80 4032.48,4712.48 H2.9
  Bottom Layer w8: H2.9 H4.9
PC13: H1.20 H3.20 IC1.7 | length 492.3
  Top Layer w8: H1.20 3428.94,3905 3470.06,3826.56 cw(c3428.94,3805) 3474.52,3813.82 3515.8,3601.61 ccw(c3541.32,3606.57) 3515.92,3601.02 3517.05,3595.86 ccw(c3539.52,3600.8) 3524.98,3582.97 3532.46,3576.86 ccw(c3537.57,3583.02) 3537.57,3575.02 3568.45,3575.02 IC1.7
  Bottom Layer w8: H3.20 H1.20
PC14: H1.21 H3.21 IC1.8 | length 415.4
  Top Layer w8: H1.21 3428.94,3805 3470.06,3726.56 cw(c3428.94,3705) 3474.21,3715.29 3502.48,3592.29 ccw(c3539.52,3600.8) 3515.44,3571.4 3523.01,3565.21 ccw(c3537.57,3583.02) 3526.35,3562.94 3535.98,3557.59 ccw(c3541.32,3567.2) 3539.41,3556.37 3545.32,3555.33 IC1.8
  Bottom Layer w8: H3.21 H1.21
PC15: H1.22 H3.22 IC1.9 | length 340.9
  Top Layer w8: H1.22 3428.94,3705 3470.06,3626.56 cw(c3428.94,3605) 3471.4,3623.78 3491.05,3579.36 ccw(c3539.52,3600.8) 3505.95,3559.78 3513.52,3553.6 ccw(c3537.57,3583.02) 3515.87,3551.82 3535.04,3538.49 ccw(c3541.32,3547.52) 3539.41,3536.69 3545.32,3535.65 IC1.9
  Bottom Layer w8: H3.22 H1.22
PD0: H2.8 H4.8 IC1.81 | length 1574.7
  Top Layer w8: IC1.81 4012.79,4792.79 H2.8
  Bottom Layer w8: H2.8 H4.8
PD1: H2.7 H4.7 IC1.82 | length 1682.8
  Top Layer w8: IC1.82 3993.11,4873.11 H2.7
  Bottom Layer w8: H2.7 H4.7
PD2: H2.6 H4.6 IC1.83 | length 1791
  Top Layer w8: IC1.83 3973.42,4953.42 H2.6
  Bottom Layer w8: H2.6 H4.6
PD3: H2.5 H4.5 IC1.84 | length 1899.1
  Top Layer w8: IC1.84 3953.74,5033.74 H2.5
  Bottom Layer w8: H2.5 H4.5
PD4: H2.4 H4.4 IC1.85 | length 2007.3
  Top Layer w8: IC1.85 3934.05,5114.05 H2.4
  Bottom Layer w8: H2.4 H4.4
PD5: H2.3 H4.3 IC1.86 | length 2115.4
  Top Layer w8: IC1.86 3914.37,5194.37 H2.3
  Bottom Layer w8: H2.3 H4.3
PD6: H1.3 H3.3 IC1.87 | length 2139.9
  Top Layer w8: H1.3 3894.68,5135.32 IC1.87
  Bottom Layer w8: H3.3 H1.3
PD7: H1.4 H3.4 IC1.88 | length 2031.8
  Top Layer w8: H1.4 3875,5055 IC1.88
  Bottom Layer w8: H3.4 H1.4
PD8: H2.31 H4.31 IC1.55 | length 722
  Top Layer w8: v1(4120,3325) 4143.07,3303.29 ccw(c4150.61,3311.3) 4148.7,3300.47 4154.61,3299.43 IC1.55@4155,3298
  Bottom Layer w8: v1(4120,3325) 4137.3,3304.87 cw(c4120,3290) 4137.62,3304.49 4216.84,3208.12 cw(c4173.58,3172.56) 4228.86,3181.56 4275.1,2898.38 cw(c4245.49,2893.55) 4275.15,2898.08 ccw(c4321.06,2905) 4279.89,2883.53 4321.06,2805 H2.31 ; H2.31@4323.03,2805 H4.31@4423.03,2805
PD9: H2.30 H4.30 IC1.56 | length 564.8
  Top Layer w8: IC1.56 4204.68,3315.3 4210.59,3314.26 cw(c4208.68,3303.43) 4219.51,3305.36 4275.38,2996.69 ccw(c4321.06,3005) 4279.89,2983.53 4321.06,2905 H2.30
  Bottom Layer w8: H2.30 H4.30
PD10: H2.29 H4.29 IC1.57 | length 489.5
  Top Layer w8: IC1.57 4204.68,3334.98 4210.59,3333.95 cw(c4208.68,3323.11) 4215.81,3331.49 4225.52,3323.24 cw(c4208.68,3303.43) 4234.21,3308.34 4275.48,3096.14 ccw(c4321.06,3105) 4279.89,3083.53 4321.06,3005 H2.29
  Bottom Layer w8: H2.29 H4.29
PD11: H2.28 H4.28 IC1.58 | length 414.2
  Top Layer w8: IC1.58 4204.68,3354.67 4210.59,3353.63 cw(c4208.68,3342.8) 4215.8,3351.18 4225.52,3342.92 ; 4225.54,3342.9 4235.2,3334.7 cw(c4208.68,3303.43) 4248.64,3312.6 4275.81,3194.58 ccw(c4321.06,3205) 4279.89,3183.53 4321.06,3105 H2.28
  Bottom Layer w8: H2.28 H4.28
PD12: H2.27 H4.27 IC1.59 | length 340
  Top Layer w8: IC1.59 4204.68,3374.35 4210.59,3373.32 cw(c4208.68,3362.48) 4215.8,3370.86 4235.23,3354.35 4244.95,3346.1 cw(c4208.68,3303.43) 4259.39,3327.19 4279.02,3285.3 ccw(c4321.06,3305) 4279.89,3283.53 4321.06,3205 H2.27
  Bottom Layer w8: H2.27 H4.27
PD13: H2.26 H4.26 IC1.60 | length 276.5
  Top Layer w8: IC1.60 4204.68,3394.04 4210.59,3393 cw(c4208.68,3382.17) 4215.62,3390.7 4321.06,3305 H2.26
  Bottom Layer w8: H2.26 H4.26
PD14: H2.25 H4.25 IC1.61 | length 245.8
  Top Layer w8: IC1.61 4204.68,3413.72 4321.06,3405 H2.25
  Bottom Layer w8: H2.25 H4.25
PD15: H2.24 H4.24 IC1.62 | length 264.2
  Top Layer w8: IC1.62 4204.68,3437.22 4210.59,3438.26 ccw(c4208.68,3449.09) 4214.41,3439.7 4321.06,3505 H2.24
  Bottom Layer w8: H2.24 H4.24
PE0: H1.12 H3.12 IC1.97 | length 1165.6
  Top Layer w8: H1.12 3700,4430 3700,3870.06 3691.31,3861.38 3691.31,3808.62 3697.83,3802.1 IC1.97
  Bottom Layer w8: H3.12 H1.12
PE1: H1.13 H3.13 IC1.98 | length 1050.2
  Top Layer w8: H1.13 3675.31,4354.69 3675.31,3801.99 3678.15,3799.16 IC1.98
  Bottom Layer w8: H3.13 H1.13
PE2: H1.14 H3.14 IC1.1 | length 953.8
  Top Layer w8: IC1.1 3570.35,3873.04 cw(c3578.35,3873.04) 3572.68,3878.68 v1(3597,3903)
  Bottom Layer w8: H3.14 H1.14 3428.94,4505 3470.06,4426.56 cw(c3428.94,4405) 3474.09,4415.82 v1(3597,3903)
PE3: H1.15 H3.15 IC1.2 | length 959.4
  Top Layer w8: IC1.2 3595.39,3669.63 v1(3645,3662)
  Bottom Layer w8: H3.15 H1.15 3428.94,4405 3470.06,4326.56 cw(c3428.94,4305) 3474.16,4315.52 3620.81,3690.72 ccw(c3643,3696) 3626.97,3679.77 v1(3645,3662)
PE4: H1.16 H3.16 IC1.3 | length 899.9
  Top Layer w8: IC1.3 3595.39,3649.94 3601.3,3648.91 cw(c3599.39,3638.07) 3604.22,3647.95 v1(3645,3628)
  Bottom Layer w8: H3.16 H1.16 3428.94,4305 3470.06,4226.56 cw(c3428.94,4205) 3473.98,4216.26 3606.32,3686.83 ccw(c3643,3696) 3610.09,3677.38 3625.15,3650.77 ccw(c3645,3662) 3628.08,3646.7 v1(3645,3628)
PE5: H1.17 H3.17 IC1.4 | length 847.3
  Top Layer w8: IC1.4 3595.39,3630.26 3601.24,3629.23 3601.3,3629.22 cw(c3599.39,3618.39) 3606.22,3627.01 v1(3647.32,3594.46)
  Bottom Layer w8: H3.17 H1.17 3428.94,4205 3470.04,4126.6 cw(c3428.94,4105) 3473.76,4117.13 3592.04,3682.14 ccw(c3643,3696) 3596.29,3671.36 3624.85,3617.31 ccw(c3645,3628) 3627.23,3613.7 ccw(c3645,3628) 3629.32,3611.44 v1(3647.32,3594.46)
PE6: H1.18 H3.18 IC1.5 | length 829.7
  Top Layer w8: IC1.5 3595.39,3610.57 3601.3,3609.53 cw(c3599.39,3598.7) 3608.02,3605.52 3626.95,3581.64 ccw(c3633.2,3586.64) 3628.35,3580.27 3633.45,3576.35 ccw(c3647.32,3594.46) 3646.49,3571.66 v1(3671.21,3570.8)
  Bottom Layer w8: H3.18 H1.18 3428.94,4105 3470.06,4026.56 cw(c3428.94,4005) 3473.34,4018.59 3578.16,3676.15 ccw(c3643,3696) 3583.04,3664.32 3611.57,3610.34 ccw(c3645,3628) 3611.67,3610.15 3625.94,3583.5 ccw(c3646.05,3594.27) 3626.63,3582.29 3626.66,3582.25 ccw(c3633.44,3586.49) 3628.59,3580.13 3633.36,3576.42 ccw(c3647.32,3594.46) 3646.49,3571.66 v1(3671.21,3570.8)
PE7: H2.46 H4.46 IC1.37 | length 2139.9
  Top Layer w8: IC1.37 3855.31,1774.69 H2.46
  Bottom Layer w8: H2.46 H4.46
PE8: H2.45 H4.45 IC1.38 | length 2031.7
  Top Layer w8: IC1.38 3875,1855 H2.45
  Bottom Layer w8: H2.45 H4.45
PE9: H2.44 H4.44 IC1.39 | length 1923.6
  Top Layer w8: IC1.39 3894.69,1935.31 H2.44
  Bottom Layer w8: H2.44 H4.44
PE10: H2.43 H4.43 IC1.40 | length 1815.4
  Top Layer w8: IC1.40 3914.37,2015.63 H2.43
  Bottom Layer w8: H2.43 H4.43
PE11: H2.42 H4.42 IC1.41 | length 1707.3
  Top Layer w8: IC1.41 3934.06,2095.94 H2.42
  Bottom Layer w8: H2.42 H4.42
PE12: H2.41 H4.41 IC1.42 | length 1599.1
  Top Layer w8: IC1.42 3953.74,2176.26 H2.41
  Bottom Layer w8: H2.41 H4.41
PE13: H2.40 H4.40 IC1.43 | length 1491
  Top Layer w8: IC1.43 3973.43,2256.57 H2.40
  Bottom Layer w8: H2.40 H4.40
PE14: H2.39 H4.39 IC1.44 | length 1382.8
  Top Layer w8: IC1.44 3993.11,2336.89 H2.39
  Bottom Layer w8: H2.39 H4.39
PE15: H2.38 H4.38 IC1.45 | length 1274.7
  Top Layer w8: IC1.45 4012.8,2417.2 H2.38
  Bottom Layer w8: H2.38 H4.38
VBAT: H1.19 H3.19 IC1.6 | length 567.6
  Top Layer w8: H1.19 3428.94,4005 3470.06,3926.56 cw(c3428.94,3905) 3474.64,3913.18 3530.49,3604.62 ccw(c3541.32,3606.57) 3530.58,3604.21 3531.7,3599.08 ccw(c3539.52,3600.8) 3539.52,3592.8 IC1.6
  Bottom Layer w8: H3.19 H1.19
Vdda: H1.32 H3.32 IC1.21 | length 827.3
  Top Layer w8: IC1.21 3595.39,3297 v1(3647,3297)
  Bottom Layer w8: H3.32 H1.32 3428.94,2705 3470.06,2783.44 ccw(c3428.94,2805) 3474.26,2794.91 3567.45,3213.48 cw(c3619,3202) 3584.11,3241.64 v1(3647,3297)
Vref: H1.31 H3.31 IC1.20 | length 764.6
  Top Layer w8: IC1.20 3595.39,3319.11 3601.3,3320.15 ccw(c3599.39,3330.98) 3602.16,3320.34 v1(3647,3332)
  Bottom Layer w8: H3.31 H1.31 3428.94,2805 3470.06,2883.44 ccw(c3428.94,2905) 3474.05,2893.99 3553.12,3218.07 cw(c3619,3202) 3569.26,3248.09 v1(3647,3332)

## Polygon pours and split planes (outlines as drawn)
GND on Top Layer "GND_L01_P002" (solid, remove dead copper, pour order 2): 3255,5850 3255,1048 4510,1048 4510,5862
+MCU on Top Layer "+MCU_L01_P000" (solid, remove dead copper, pour order 0): 3425,3623.59 3425,3486 3474.65,3436.35 3550.22,3436.35 3625.56,3361 3570.35,3305.79 3570.35,3236.65 3643,3164 4103,3164 4175,3236 4175,3709 4123.41,3760.59 3562,3760.59
GND on Bottom Layer "GND_L03_P001" (solid, remove dead copper, pour order 1): 3246,5861 4502,5861 4512,5851 4512,1057 3250,1057

## Silkscreen, mask and mechanical layers (free items; w line width, h text height)
Top Overlay:
  text "GND" at 4142,5778 h30
  text "GND" at 3492,5775 h30
  text "PD6 /  / PD7 /  / PB3 /  / PB4 /  / PB5 /  / PB6 /  / PB7" at 3493,4978 h30
  text "PB8 /  / PB9 /  / PE0 /  / PE1" at 3492,4586 h30
  text "PD5 /  / PD4 /  / PD3 /  / PD2 /  / PD1 /  / PD0 /  / PC12 /  / PC11 /  / PC10 /  / PA15 /  / PA14" at 4141,4578 h30
  text "PE2 /  / PE3 /  / PE4 /  / PE5 /  / PE6 /  / VBAT /  / PC13" at 3493,3878 h30
  text "PA13 /  / PA12 /  / PA11 /  / PA10 /  / PA9 /  / PA8 /  / PC9 /  / PC8" at 4141,3773 h30
  text "PC14 / OSC / 32_IN" at 3481,3743 h23
  text "OUT" at 3471,3692 h23 r315
  text "+" at 3487,3590 h23
  text "G" at 3482,3387 h23
  text "C7 /  / C6 /  / D15 /  / D14 /  / D13" at 4211,3307 h25
  text "G" at 3483,3292 h23
  text "PC0" at 3485,3172 h23
  text "PD12 /  / PD11 /  / PD10 /  / PD9 /  / PD8 /  / PB15 /  / PB14 /  / PB13 /  / PB12" at 4142,2362 h30
  text "PC1 /  / PC2 /  / PC3 /  / VREF+ /  / VDDA /  / PA0 /  / PA1 /  / PA2 /  / PA3 /  / PA4 /  / PA5 /  / PA6 /  / PA7 /  / PC4 /  / PC5 /  / PB0 /  / PB1 /  / PB2" at 3486,1383 h29.5
  text "PB11 /  / PB10 /  / PE15 /  / PE14 /  / PE13 /  / PE12 /  / PE11 /  / PE10 /  / PE9 /  / PE8 /  / PE7" at 4139,1276 h30
  text "GND" at 3486,1081 h30
  text "GND" at 4140,1081 h30
Draft:
  lines w1.97: 3250.25,3454.97 4510.09,3454.97 ; 3280.97,1060.97 3325,1105 ; 3280.97,1149.03 3325,1105 ; 3280.97,5760.97 3325,5805 ; 3280.97,5849.03 3325,5805 ; 3369.03,1060.97 3325,1105 ; 3369.03,1149.03 3325,1105 ; 3369.03,5760.97 3325,5805 ; 3369.03,5849.03 3325,5805 ; 3380.97,1060.97 3425,1105 ; 3380.97,1149.03 3425,1105 ; 3380.97,5760.97 3425,5805 ; 3380.97,5849.03 3425,5805 ; 3469.03,1060.97 3425,1105 ; 3469.03,1149.03 3425,1105 ; 3469.03,5760.97 3425,5805 ; 3469.03,5849.03 3425,5805 ; 3475,1165.5 3475,5744.5 ; 3836.14,3410.95 3880.17,3454.97 ; 3836.14,3499 3880.17,3454.97 ; 3880.17,1050 3880.17,3454.97 ; 3880.17,5859.95 3880.17,3454.97 ; 3924.2,3410.95 3880.17,3454.97 ; 3924.2,3499 3880.17,3454.97 ; 4280.97,1060.97 4325,1105 ; 4280.97,1149.03 4325,1105 ; 4280.97,5760.97 4325,5805 ; 4280.97,5849.03 4325,5805 ; 4285.34,1165.45 4285.34,5744.45 ; 4369.03,1060.97 4325,1105 ; 4369.03,1149.03 4325,1105 ; 4369.03,5760.97 4325,5805 ; 4369.03,5849.03 4325,5805 ; 4380.97,1060.97 4425,1105 ; 4380.97,1149.03 4425,1105 ; 4380.97,5760.97 4425,5805 ; 4380.97,5849.03 4425,5805 ; 4469.03,1060.97 4425,1105 ; 4469.03,1149.03 4425,1105 ; 4469.03,5760.97 4425,5805 ; 4469.03,5849.03 4425,5805 ; 3250.25,1050 3250.25,5859.95 4510.09,5859.95 4510.09,1050 3250.25,1050
OUTLINE:
  the board outline again, w0.5